# Altium PCB PCB2.PcbDoc
Units mm, origin at the board's own origin, x right, y up, seen from the top; angles counter-clockwise.
Board outline 64.01 x 71.63 mm, 2 copper layers (Top Layer, Bottom Layer); 41 components, 29 nets, 106 pads, 3 vias.
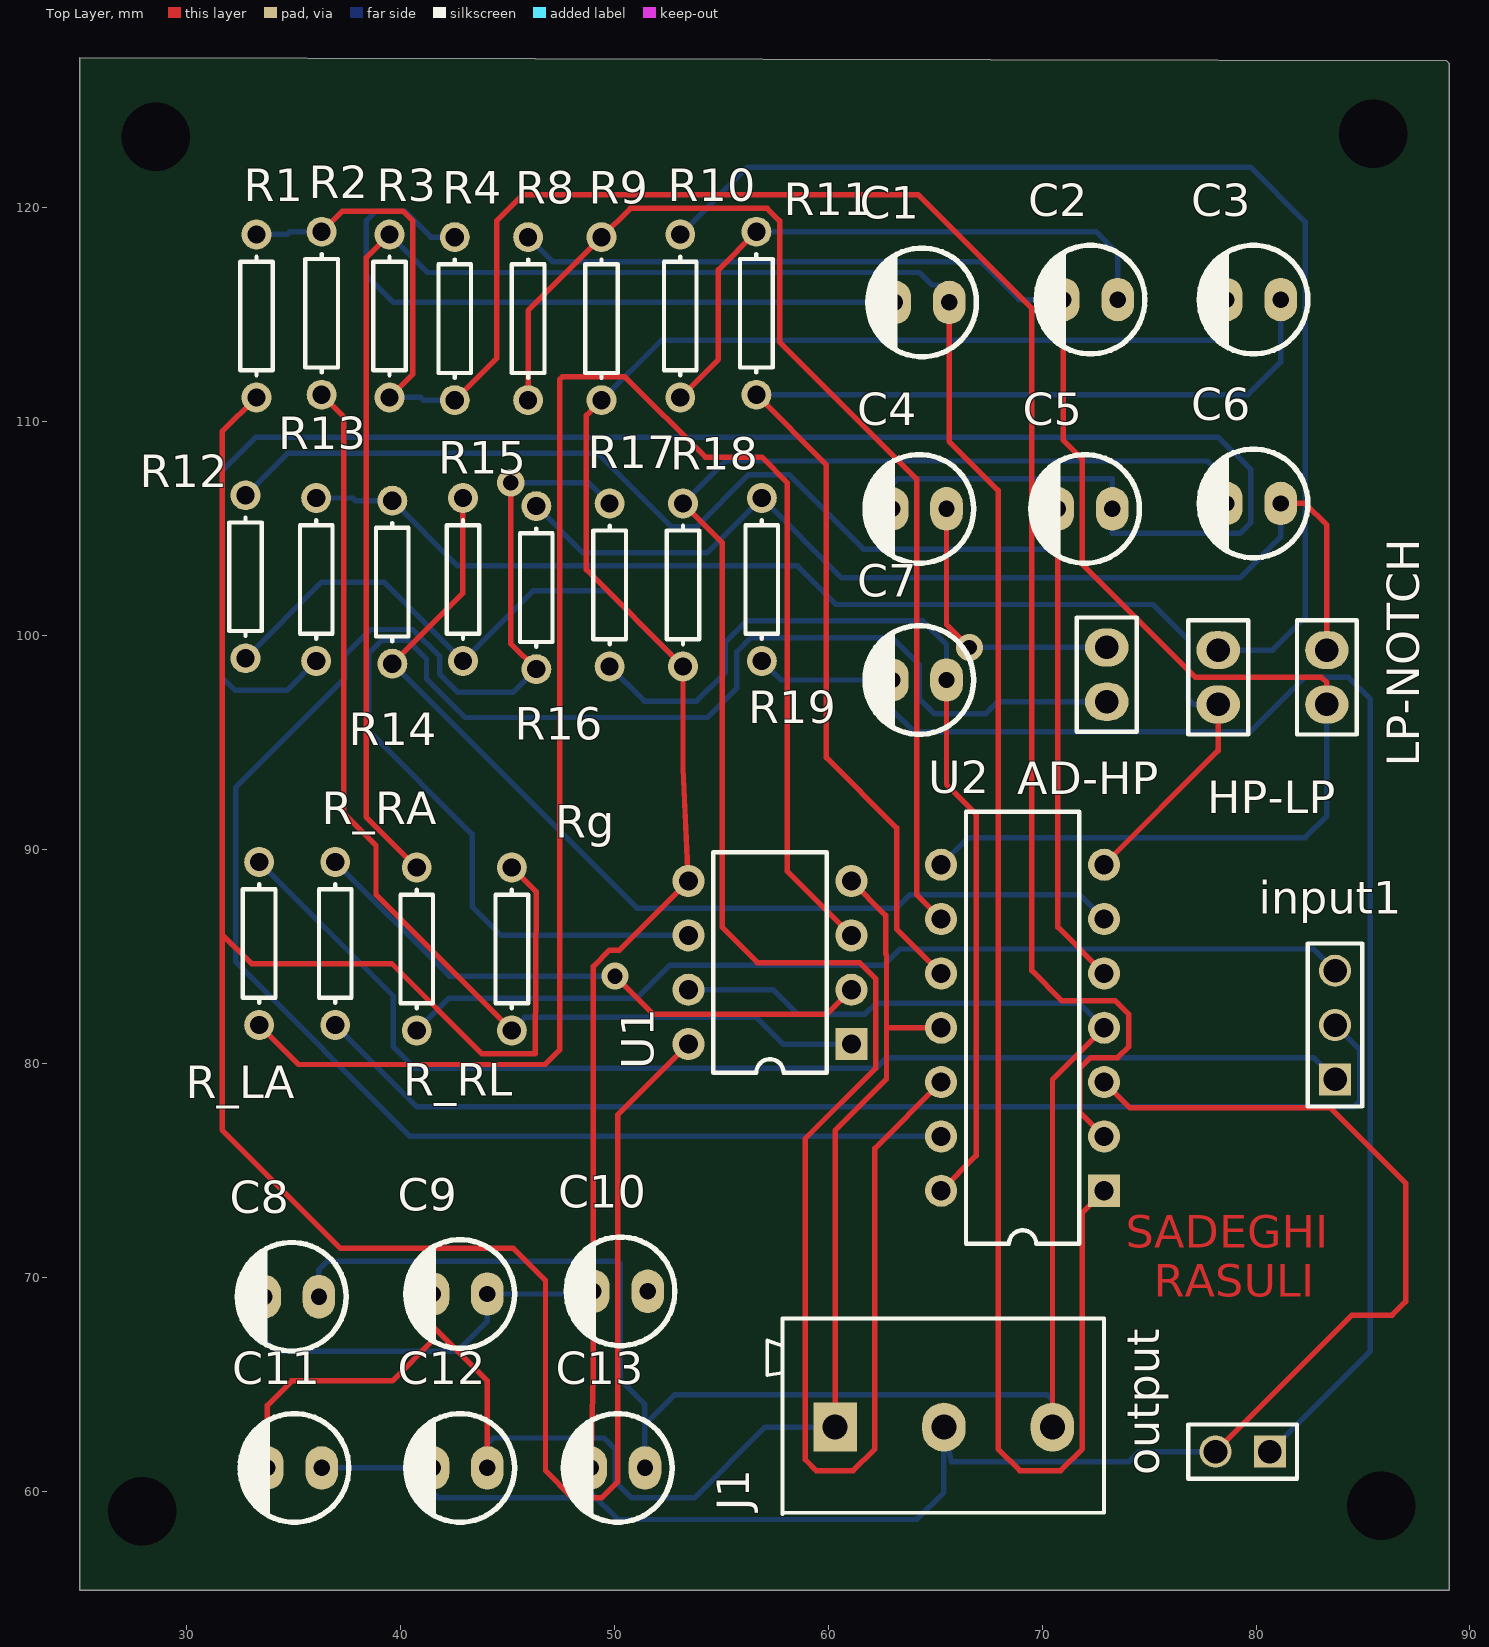
[diagram p0: Top Layer view]
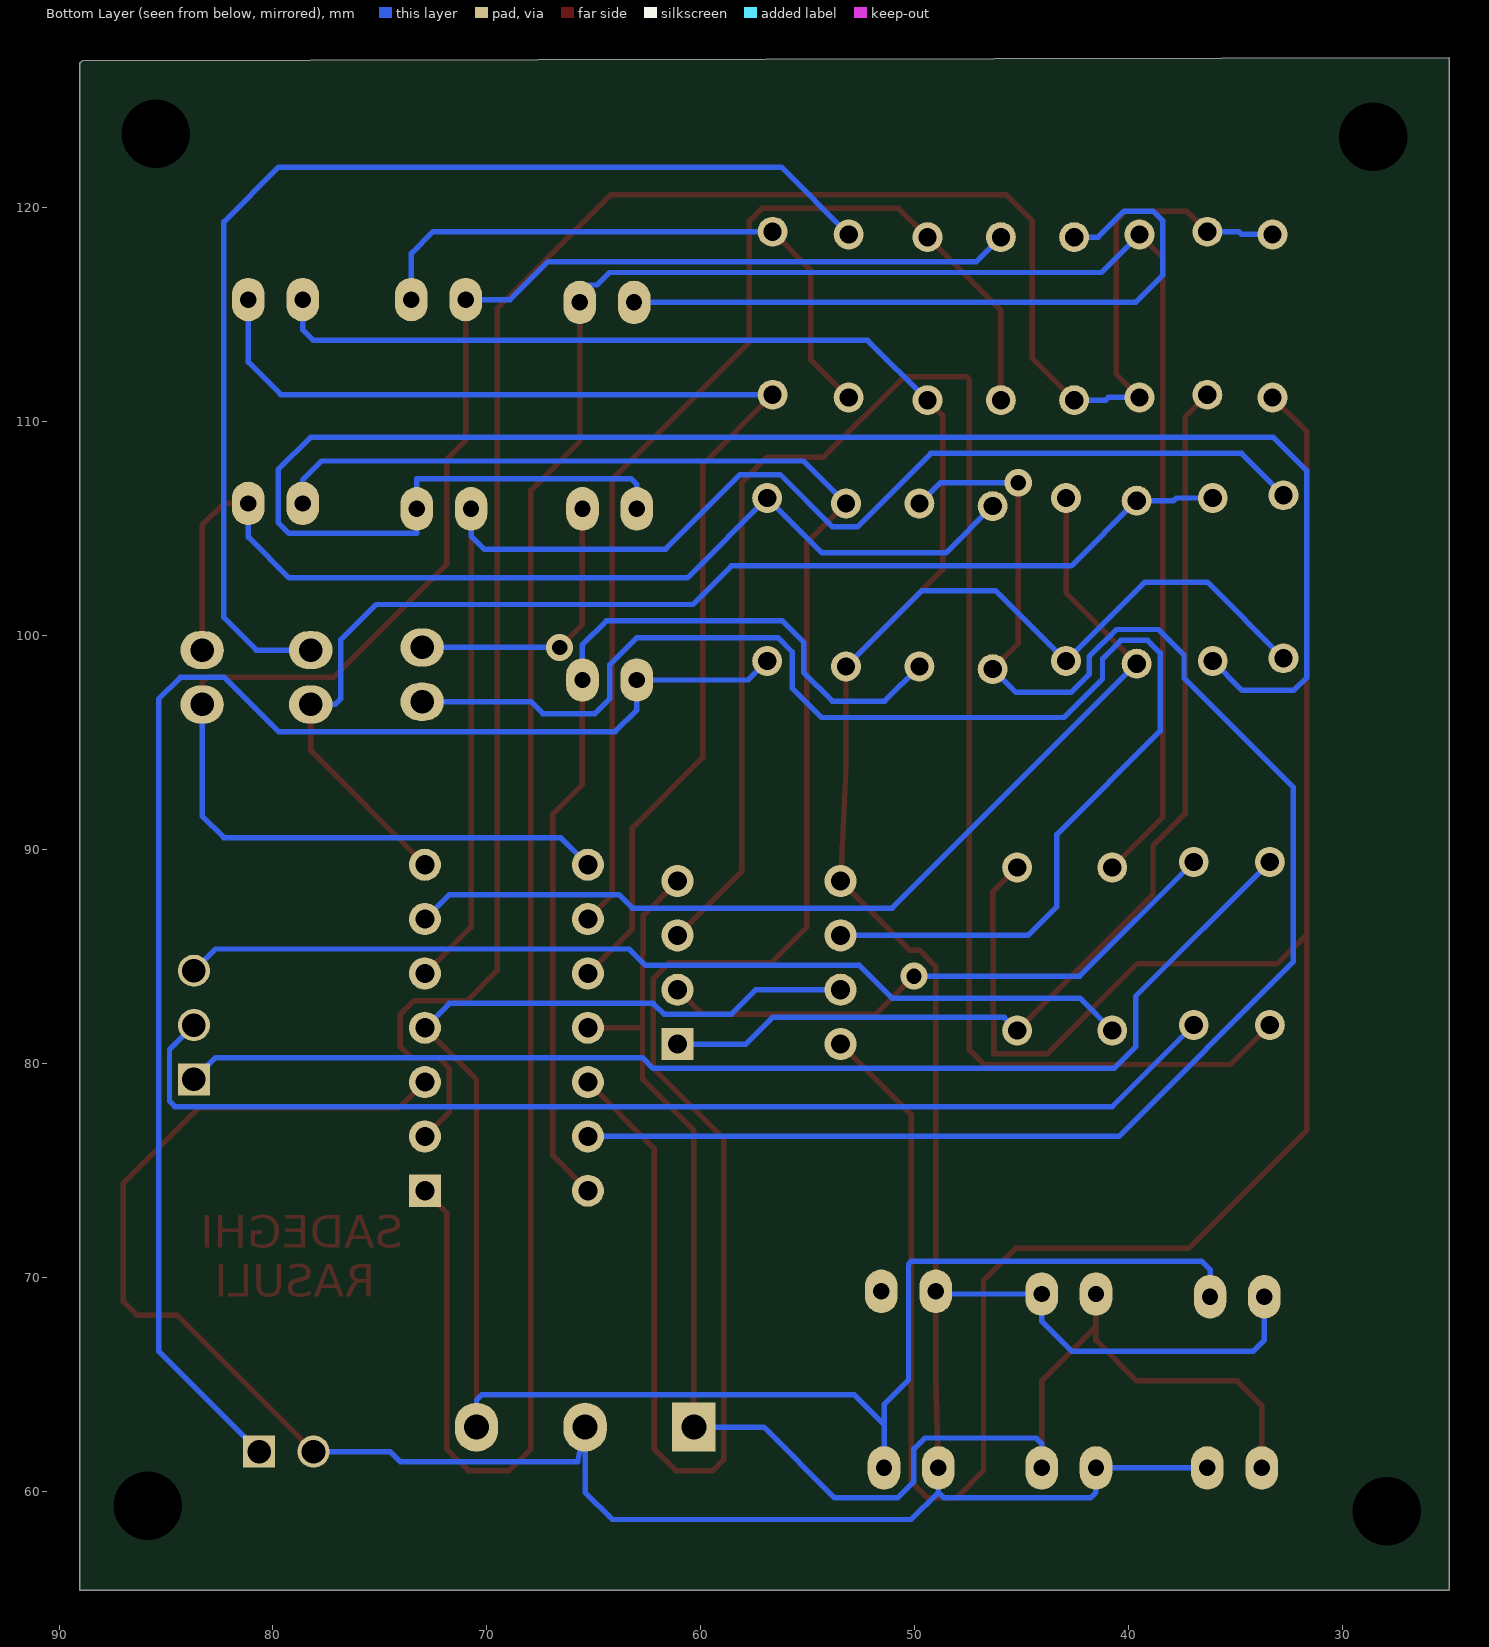
[diagram p1: Bottom Layer view, seen from below]

## Layer stack, top to bottom
Top Solder: solder mask 0.0102, Solder Resist, Dk 3.5
Top Layer: signal copper 0.0356
Dielectric 1: dielectric 0.32, FR-4, Dk 4.8
Bottom Layer: signal copper 0.0356
Bottom Solder: solder mask 0.0102, Solder Resist, Dk 3.5

## Board outline
88.9,126.873 89.027,126.746 89.027,55.372 25.019,55.372 25.019,127

## Design rules (kind name [scope] priority, off if disabled: settings)
Clearance [All] p1: gap=0.254
PolygonConnect [All] p1: connectstyle=Relief reliefconductorwidth=0.254 reliefentries=4 polygonreliefangle="90 Angle" airgapwidth=0.254
RoutingVias [All] p1: holewidth=0.711 width=1.27 viastyle="Through Hole" minholewidth=0.711 minwidth=1.27 maxholewidth=0.711 maxwidth=1.27
SolderMaskExpansion [All] p1: expansion=0.102
Width [All] p1: maxlimit=0.254 minlimit=0.254 preferedwidth=0.254
30 further rules are at their usual default settings.

## Components (designator, comment, footprint, x,y, rotation, side; value= is the part's Value field where it differs from the comment)
AD-HP "Jumper" "Header 2X1" 73.025,98.171 r90 top
C1 "100n" ELEC-CAP-RAD10-20 64.389,115.57 r0 top
C2 "10n" ELEC-CAP-RAD10-20 72.263,115.697 r0 top
C3 "100n" ELEC-CAP-RAD10-20 79.883,115.697 r0 top
C4 "10u" ELEC-CAP-RAD10-20 64.262,105.918 r0 top
C5 "10u" ELEC-CAP-RAD10-20 72.009,105.918 r0 top
C6 "47n" ELEC-CAP-RAD10-20 79.883,106.172 r0 top
C7 "47n" ELEC-CAP-RAD10-20 64.262,97.917 r0 top
C8 "10u" ELEC-CAP-RAD10-20 34.925,69.088 r0 top
C9 "10u" ELEC-CAP-RAD10-20 42.799,69.215 r0 top
C10 "100n" ELEC-CAP-RAD10-20 50.292,69.342 r0 top
C11 "100n" ELEC-CAP-RAD10-20 35.052,61.087 r0 top
C12 "10n" ELEC-CAP-RAD10-20 42.799,61.087 r0 top
C13 "10n" ELEC-CAP-RAD10-20 50.165,61.087 r0 top
HP-LP "Jumper" "Header 2X1" 78.232,98.044 r90 top
input1 "Header 3" HDR1X3 83.693,79.248 r90 top
J1 "TBlock-3" "KF300-3 PIN" 60.325,62.992 r90 top
LP-NOTCH "Jumper" "Header 2X1" 83.312,98.044 r90 top
output "Header 2" HDR1X2 80.645,61.849 r180 top
R1 "Res1" AXIAL-0.3 33.274,114.935 r90 top
R2 "Res1" AXIAL-0.3 36.322,115.062 r90 top
R3 "Res1" AXIAL-0.3 39.497,114.935 r90 top
R4 "Res1" AXIAL-0.3 42.545,114.808 r90 top
R8 "Res1" AXIAL-0.3 45.974,114.808 r90 top
R9 "Res1" AXIAL-0.3 49.403,114.808 r90 top
R10 "Res1" AXIAL-0.3 53.086,114.935 r90 top
R11 "Res1" AXIAL-0.3 56.642,115.062 r90 top
R12 "Res1" AXIAL-0.3 32.766,102.743 r90 top
R13 "Res1" AXIAL-0.3 36.068,102.616 r90 top
R14 "Res1" AXIAL-0.3 39.624,102.489 r90 top
R15 "Res1" AXIAL-0.3 42.926,102.616 r90 top
R16 "Res1" AXIAL-0.3 46.355,102.235 r90 top
R17 "Res1" AXIAL-0.3 49.784,102.362 r90 top
R18 "Res1" AXIAL-0.3 53.213,102.362 r90 top
R19 "Res1" AXIAL-0.3 56.896,102.616 r90 top
R_LA "Res1" AXIAL-0.3 33.401,85.598 r90 top
R_RA "Res1" AXIAL-0.3 36.957,85.598 r90 top
R_RL "Res1" AXIAL-0.3 40.767,85.344 r90 top
Rg "Res1" AXIAL-0.3 45.212,85.344 r90 top
U1 "AD620AN" N-8 57.277,84.709 r90 top
U2 "TL084J" J014 69.088,81.661 r90 top

## Footprints (in the part's own frame and the unit in brackets; to place one, negate y for a bottom-side part, rotate by r counter-clockwise, add the part's x,y. Pads: shape width x height; smd on the part's side, far side on the other; paste and mask are expansions set on the pad)
AXIAL-0.3 [mm] "Axial Device, Thru-Hole; 2 Leads; 0.3 in Pin Spacing"
  round 1.4 hole 0.85: 1(-3.81,0) 2(3.81,0)
  silkscreen extent -2.77,-0.76 2.77,0.76
ELEC-CAP-RAD10-20 [mil]
  oval 60x80 hole 30: 1(-50,0) 2(50,0)
  silkscreen extent -100,-100 100,100, body extent -124,-124 124,124, height 404
HDR1X2 [mm] "Connector; Header; 2 Position"
  rect 1.5x1.5 hole 1.1: 1(0,0)
  round 1.5 hole 1.1: 2(2.54,0)
  silkscreen extent -1.27,-1.27 3.81,1.27
HDR1X3 [mm] "Connector; Header; 3 Position"
  rect 1.5x1.5 hole 1.1: 1(0,0)
  round 1.5 hole 1.1: 2(2.54,0) 3(5.08,0)
  silkscreen extent -1.27,-1.27 6.35,1.27
"Header 2X1" [mil]
  oval 70x80 hole 43.31: 1(-50,0) 2(50,0)
  silkscreen extent -105,-55 105,55, body extent -100,-50 100,50, height 374
J014 [mm] "DIP; 14 Leads; Row Spacing 7.62 mm; Pitch 2.54 mm"
  rect 1.5x1.5 hole 0.9: 1(-7.62,-3.81)
  round 1.5 hole 0.9: 2(-5.08,-3.81) 3(-2.54,-3.81) 4(0,-3.81) 5(2.54,-3.81) 6(5.08,-3.81) 7(7.62,-3.81) 8(7.62,3.81) 9(5.08,3.81) 10(2.54,3.81) 11(0,3.81) 12(-2.54,3.81) 13(-5.08,3.81) 14(-7.62,3.81)
  silkscreen extent -10.1,-2.65 10.1,2.65
"KF300-3 PIN" [mil]
  rect 90x80 hole 46: 1(0,0)
  oval 90x80 hole 46: 2(0,-200) 3(0,-400)
  silkscreen extent -160,-495 200,125, body extent -157,-495 200,128, height 503
N-8 [mm] "DIP; 8 Leads; Row Spacing 7.62 mm; Pitch 2.54 mm"
  rect 1.5x1.5 hole 0.9: 1(-3.81,-3.81)
  round 1.5 hole 0.9: 2(-1.27,-3.81) 3(1.27,-3.81) 4(3.81,-3.81) 5(3.81,3.81) 6(1.27,3.81) 7(-1.27,3.81) 8(-3.81,3.81)
  silkscreen extent -5.15,-2.65 5.15,2.65

## Part data
C1 C2 C3 C4 C5 C6 C7 C8 C9 C10 C11 C12 C13: library part "Capacitor Electrolytic", "Electrolytic Capacitor"
input1: "Header, 3-Pin"
output: "Header, 2-Pin"
R1 R2 R3 R4 R8 R9 R10 R11 R12 R13 R14 R15 R16 R17 R18 R19 R_LA R_RA R_RL Rg: "Resistor"
U1: "Low-Cost, Low-Power Instrumentation Amplifier"
U2: "JFET-Input Operational Amplifier"

## Free pads (board coordinates)
  round 1.6 hole 3.2: 0(85.471,123.444) 1(28.575,123.317) 2(27.94,59.055) 3(85.852,59.309)

## Via types
v1: diameter 1.27, hole 0.711, Top Layer to Bottom Layer, 3 vias

## Nets (pads, with @x,y where several pads share a name; then routed paths per layer and width w, separated by ;. In a path a pad name is that pad's centre, name@x,y a point inside that pad or via, vN(x,y) a via of type N, cw(c..) or ccw(c..) an arc to the next point about the centre after c; other vN are vias at no path point)
AD_OUT: AD-HP.1 U1.6 | length 66.5
  Bottom Layer w0.254: U1.6 44.704,85.979 43.358,87.325 43.358,90.703 38.532,95.529 38.532,99.187 39.116,99.771 40.361,99.771 41.224,98.908 41.224,97.963 43.023,96.164 54.356,96.164 55.728,97.536 55.728,99.238 56.388,99.898 62.992,99.898 64.262,98.628 64.262,97.028 64.948,96.342 67.386,96.342 67.945,96.901 AD-HP.1
GND: C3.1 C8.1 C9.2 C10.1 C11.2 C12.1 C13.1 J1.2 output.2 R9.1 R12.1 R15.1 R18.1 U1.5 U2.3 | length 215.3
  Top Layer w0.254: C13.1 49.022,65.354 C10.1 49.022,84.529 49.784,85.291 50.239,85.291 U1.5 53.213,93.802 R18.1 48.692,103.073 48.692,110.287 R9.1 ; U2.3 74.092,77.927 83.464,77.927 86.995,74.397 86.995,68.859 86.36,68.224 84.48,68.224 output.2
  Bottom Layer w0.254: R12.1 36.322,102.489 39.243,102.489 R15.1 46.203,102.083 49.682,102.083 R18.1 ; C8.1 33.655,67.056 34.163,66.548 42.672,66.548 44.069,67.945 C9.2 49.022,69.215 C10.1 ; C11.2 C12.1 41.529,59.944 41.783,59.69 48.641,59.69 48.895,59.944 ; C13.1 48.895,59.944 ; R9.1 52.197,113.792 78.105,113.792 78.613,114.3 C3.1 ; output.2 74.524,61.849 74.041,61.366 65.761,61.366 J1.2 65.405,59.944 64.135,58.674 50.165,58.674 48.895,59.944
HP_IN: AD-HP.2 C4.2 | length 13.3
  Top Layer w0.254: C4.2 65.532,100.508 v1(66.599,99.441)
  Bottom Layer w0.254: v1(66.599,99.441) AD-HP.2
HP_OUT: HP-LP.1 R13.2 R14.2 U2.7 | length 57.5
  Top Layer w0.254: U2.7 78.232,94.615 HP-LP.1
  Bottom Layer w0.254: R13.2 37.77,106.426 37.897,106.299 R14.2 42.672,103.251 58.572,103.251 60.376,101.448 75.184,101.448 76.835,99.797 76.835,97.028 77.089,96.774 HP-LP.1
LA: R_LA.1 U1.3 | length 81.6
  Top Layer w0.254: R_LA.1 35.244,79.945 46.768,79.945 47.447,80.624 47.447,111.963 47.574,112.09 50.495,112.09 54.254,108.331 56.896,108.331 58.09,107.137 58.09,88.976 U1.3
LP_IN: HP-LP.2 R10.2 | length 54.8
  Bottom Layer w0.254: R10.2 56.236,121.895 79.731,121.895 82.296,119.329 82.296,100.838 80.772,99.314 HP-LP.2
LP_OUT: C2.1 LP-NOTCH.1 R8.2 U2.8 | length 77.9
  Top Layer w0.254: C2.1 70.993,109.118 71.882,108.229 71.882,103.327 77.165,98.044 83.058,98.044 83.312,97.79 LP-NOTCH.1
  Bottom Layer w0.254: R8.2 47.117,117.475 67.132,117.475 68.91,115.697 C2.1 ; U2.8 66.548,90.551 82.296,90.551 83.312,91.567 LP-NOTCH.1
NetC1_1: C1.1 R4.2 | length 32.6
  Bottom Layer w0.254: R4.2 41.427,118.618 40.208,119.837 38.862,119.837 38.405,119.38 38.405,116.84 39.675,115.57 C1.1
NetC2_2: C2.2 R10.1 R11.2 | length 28.7
  Top Layer w0.254: R10.1 54.864,112.903 54.864,117.094 R11.2
  Bottom Layer w0.254: R11.2 72.517,118.872 73.533,117.856 C2.2
NetC3_2: C3.2 R11.1 U2.10 | length 58.7
  Top Layer w0.254: R11.1 59.919,107.975 59.919,94.285 63.195,91.008 63.195,86.284 U2.10
  Bottom Layer w0.254: R11.1 79.629,111.252 81.153,112.776 C3.2
NetC4_1: C4.1 C5.2 R13.1 | length 87.5
  Bottom Layer w0.254: R13.1 34.696,97.434 32.283,97.434 31.674,98.044 31.674,107.696 33.249,109.271 78.232,109.271 79.756,107.747 79.756,105.283 79.248,104.775 73.279,104.775 C5.2 73.279,107.315 63.246,107.315 62.992,107.061 C4.1
NetC5_1: C5.1 R12.2 U2.5 | length 66.8
  Top Layer w0.254: C5.1 70.739,86.36 U2.5
  Bottom Layer w0.254: R12.2 34.722,108.509 49.251,108.509 52.68,105.08 53.848,105.08 56.286,107.518 58.166,107.518 61.646,104.038 70.129,104.038 70.739,104.648 C5.1
NetC6_1: C6.1 R18.2 U2.12 | length 102.6
  Top Layer w0.254: R18.2 55.042,104.343 55.042,86.36 56.693,84.709 61.468,84.709 62.218,83.959 62.218,79.768 58.928,76.478 58.928,61.468 59.436,60.96 61.163,60.96 62.179,61.976 62.179,76.022 U2.12
  Bottom Layer w0.254: R18.2 55.194,108.153 77.724,108.153 78.613,107.264 C6.1
NetC7_2: C7.2 R17.1 U2.14 | length 46.1
  Top Layer w0.254: U2.14 66.917,75.68 66.917,91.655 65.532,93.04 C7.2
  Bottom Layer w0.254: R17.1 51.41,96.926 53.848,96.926 55.193,98.271 55.193,99.694 56.185,100.686 64.414,100.686 65.532,99.568 C7.2
Netinput1_1: input1.1 R_LA.2 | length 56.3
  Bottom Layer w0.254: R_LA.2 39.675,83.134 39.675,80.772 40.679,79.768 62.23,79.768 62.726,80.264 82.677,80.264 input1.1
Netinput1_2: input1.2 R_RA.1 | length 53.6
  Bottom Layer w0.254: R_RA.1 40.767,77.978 84.582,77.978 84.836,78.232 84.836,80.645 input1.2
Netinput1_3: input1.3 R_RL.1 | length 44.9
  Bottom Layer w0.254: R_RL.1 42.283,83.05 51.054,83.05 52.586,84.582 62.586,84.582 63.348,85.344 82.677,85.344 input1.3
NetR1_1: R1.1 Rg.2 U1.8 | length 114
  Top Layer w0.254: R1.1 31.674,109.525 31.674,86.03 ; Rg.2 46.355,88.011 46.304,80.453 43.804,80.453 39.599,84.658 33.045,84.658 31.674,86.03 ; U1.8 50.165,77.597 50.165,60.452 49.403,59.69 48.057,59.69 46.787,60.96 46.787,69.85 45.288,71.349 37.211,71.349 31.674,76.886 31.674,86.03
NetR1_2: R1.2 R2.2 R3.1 R4.1 U2.2 | length 100.9
  Top Layer w0.254: R2.2 37.287,119.837 40.132,119.837 40.589,119.38 40.589,112.217 R3.1 ; R4.1 44.501,112.954 44.501,119.38 45.72,120.599 64.211,120.599 69.52,115.291 69.52,84.328 70.917,82.931 73.406,82.931 74.041,82.296 74.041,80.772 73.533,80.264 72.263,80.264 71.755,79.756 71.755,77.724 U2.2
  Bottom Layer w0.254: R1.2 34.722,118.745 34.849,118.872 R2.2 ; R3.1 40.945,111.125 41.072,110.998 R4.1
NetR2_1: R2.1 Rg.1 U1.1 | length 50
  Top Layer w0.254: R2.1 37.363,110.211 37.363,91.669 38.862,90.17 38.862,87.884 Rg.1
  Bottom Layer w0.254: Rg.1 45.822,82.144 56.642,82.144 57.887,80.899 U1.1
NetR8_1: R8.1 R9.2 U2.9 | length 53.9
  Top Layer w0.254: R8.1 45.974,115.189 R9.2 50.749,119.964 57.15,119.964 57.734,119.38 57.734,113.716 64.135,107.315 64.135,87.884 U2.9
NetR14_1: R14.1 R15.2 U2.6 | length 47.9
  Top Layer w0.254: R14.1 42.926,101.981 R15.2
  Bottom Layer w0.254: R14.1 51.054,87.249 63.195,87.249 63.83,87.884 71.755,87.884 U2.6
NetR16_1: R16.1 R17.2 U2.13 | length 78.6
  Top Layer w0.254: v1(45.161,107.137) 45.161,99.619 R16.1
  Bottom Layer w0.254: v1(45.161,107.137) 48.819,107.137 R17.2 ; R16.1 45.272,97.342 42.688,97.342 41.845,98.185 41.845,99.005 40.571,100.279 38.608,100.279 37.414,99.085 37.414,98.019 32.309,92.913 32.309,84.734 40.462,76.581 U2.13
NOTCH_IN: C6.2 LP-NOTCH.2 R16.2 R19.2 | length 49.1
  Top Layer w0.254: C6.2 82.296,106.172 83.312,105.156 LP-NOTCH.2
  Bottom Layer w0.254: R16.2 48.539,103.861 54.331,103.861 R19.2 60.63,102.692 79.248,102.692 81.153,104.597 C6.2
OUT: C7.1 output.1 R19.1 | length 69.2
  Bottom Layer w0.254: R19.1 57.785,97.917 C7.1 62.992,96.52 64.008,95.504 79.731,95.504 82.271,98.044 84.328,98.044 85.344,97.028 85.344,66.548 output.1
RA: R_RA.2 U1.2 | length 27.5
  Top Layer w0.254: v1(50.038,84.074) 51.816,82.296 59.944,82.296 U1.2
  Bottom Layer w0.254: R_RA.2 42.291,84.074 v1(50.038,84.074)
RL: C1.2 R3.2 R_RL.2 U2.1 | length 130.8
  Top Layer w0.254: R3.2 38.405,117.653 38.405,91.516 R_RL.2 ; C1.2 65.659,109.068 67.945,106.782 67.945,61.976 68.961,60.96 70.866,60.96 71.882,61.976 71.882,73.025 U2.1
  Bottom Layer w0.254: R3.2 41.275,116.967 64.262,116.967 64.846,116.383 65.659,116.383 C1.2
VCC: C8.2 C13.2 J1.3 U1.7 U2.4 | length 86.8
  Top Layer w0.254: J1.3 70.485,79.248 U2.4
  Bottom Layer w0.254: C8.2 36.195,70.358 36.576,70.739 50.165,70.739 50.292,70.612 50.292,65.202 51.435,64.059 51.435,63.119 ; C13.2 51.435,63.119 ; U1.7 57.429,83.439 58.572,82.296 61.722,82.296 62.23,82.804 71.755,82.804 U2.4 ; J1.3 70.485,64.262 70.231,64.516 52.832,64.516 51.435,63.119
VEE: C9.1 C11.1 C12.2 J1.1 U1.4 U2.11 | length 72.4
  Top Layer w0.254: C11.1 33.782,64.008 34.925,65.151 39.624,65.151 41.529,67.056 41.529,67.691 ; C9.1 41.529,67.691 ; C12.2 44.069,65.151 41.529,67.691 ; J1.1 60.325,76.859 62.726,79.26 62.726,81.661 ; U1.4 62.687,86.919 62.687,85.117 62.726,85.078 62.726,81.661 ; U2.11 62.726,81.661
  Bottom Layer w0.254: C12.2 44.069,62.23 44.323,62.484 49.53,62.484 50.038,61.976 50.038,60.452 50.8,59.69 53.746,59.69 57.048,62.992 J1.1
pads on no net: C10.2

## Other copper
Top Layer:
  text "SADEGHI /   RASULI" at 73.914,69.088 h1.52